# EAGLE board CT_schematic (EAGLE 7.6.0)

Size 100 x 80 mm. Coordinates in mm from the lower left corner, seen from the top.
Outline: 0,0 100,0 100,80 0,80 0,0
Copper layers (1*16): Top 0.035mm / dielectric 1.5mm / Bottom 0.035mm
Design rules "default": minimum track width 10mil, minimum drill 24mil, track to track 8mil, track to pad 8mil, pad to pad 8mil, via to via 8mil, smd to smd 8mil, copper to edge 40mil, drill to drill 8mil, minimum pad ring 10mil, minimum via ring 8mil, stop-mask expansion 4mil, vias tented up to drill 0mil, thermal gap 10mil

## Footprints (pad centres in the part's own frame; a part is rotated, then mirrored left to right if it is on the bottom)
C0603 = smd 0.8 x 0.8: 1 -0.762,0; 2 0.762,0
C0402 = smd 0.5 x 0.5: 1 -0.508,0; 2 0.508,0
C0805 = smd 1.2 x 1.3: 1 -1.016,0; 2 1.016,0
EXV-9H = smd 3.505 x 1.676: 1 -2.857,0; 2 2.857,0
L0603 = smd 0.8 x 0.8: 1 -0.762,0; 2 0.762,0
L0805 = smd 1.2 x 1.3: 1 -1.016,0; 2 1.016,0
PJ-037B_PACKAGE = drill 3.7 square: 1 12,0 | drill 3.2 square: 2 6,0
R0603 = smd 0.8 x 0.8: 1 -0.762,0; 2 0.762,0
LQFP100 = smd 0.3 x 1.2: 1 -6,-7.75; 2 -5.5,-7.75; 3 -5,-7.75; 4 -4.5,-7.75; 5 -4,-7.75; 6 -3.5,-7.75; 7 -3,-7.75; 8 -2.5,-7.75; 9 -2,-7.75; 10 -1.5,-7.75; 11 -1,-7.75; 12 -0.5,-7.75; 13 0,-7.75; 14 0.5,-7.75; 15 1,-7.75; 16 1.5,-7.75; 17 2,-7.75; 18 2.5,-7.75; 19 3,-7.75; 20 3.5,-7.75; 21 4,-7.75; 22 4.5,-7.75; 23 5,-7.75; 24 5.5,-7.75; 25 6,-7.75; 51 6,7.75; 52 5.5,7.75; 53 5,7.75; 54 4.5,7.75; 55 4,7.75; 56 3.5,7.75; 57 3,7.75; 58 2.5,7.75; 59 2,7.75; 60 1.5,7.75; 61 1,7.75; 62 0.5,7.75; 63 0,7.75; 64 -0.5,7.75; 65 -1,7.75; 66 -1.5,7.75; 67 -2,7.75; 68 -2.5,7.75; 69 -3,7.75; 70 -3.5,7.75; 71 -4,7.75; 72 -4.5,7.75; 73 -5,7.75; 74 -5.5,7.75; 75 -6,7.75 | smd 1.2 x 0.3: 26 7.75,-6; 27 7.75,-5.5; 28 7.75,-5; 29 7.75,-4.5; 30 7.75,-4; 31 7.75,-3.5; 32 7.75,-3; 33 7.75,-2.5; 34 7.75,-2; 35 7.75,-1.5; 36 7.75,-1; 37 7.75,-0.5; 38 7.75,0; 39 7.75,0.5; 40 7.75,1; 41 7.75,1.5; 42 7.75,2; 43 7.75,2.5; 44 7.75,3; 45 7.75,3.5; 46 7.75,4; 47 7.75,4.5; 48 7.75,5; 49 7.75,5.5; 50 7.75,6; 76 -7.75,6; 77 -7.75,5.5; 78 -7.75,5; 79 -7.75,4.5; 80 -7.75,4; 81 -7.75,3.5; 82 -7.75,3; 83 -7.75,2.5; 84 -7.75,2; 85 -7.75,1.5; 86 -7.75,1; 87 -7.75,0.5; 88 -7.75,0; 89 -7.75,-0.5; 90 -7.75,-1; 91 -7.75,-1.5; 92 -7.75,-2; 93 -7.75,-2.5; 94 -7.75,-3; 95 -7.75,-3.5; 96 -7.75,-4; 97 -7.75,-4.5; 98 -7.75,-5; 99 -7.75,-5.5; 100 -7.75,-6
SOIC-8 = smd 1.6 x 0.6: 1 -2.7,1.905 | smd 1.55 x 0.6: 2 -2.7,0.635; 3 -2.7,-0.635; 4 -2.7,-1.905; 5 2.7,-1.905; 6 2.7,-0.635; 7 2.7,0.635; 8 2.7,1.905
ETRX3587 = smd 1 x 1.4: 1 0,0; 2 1.27,0; 3 2.54,0; 4 3.81,0; 5 5.08,0; 6 6.35,0; 7 7.62,0; 8 8.89,0; 9 10.16,0; 10 11.43,0; 11 12.7,0; 12 13.97,0; 13 15.24,0; 14 16.51,0; 15 17.78,0; 16 19.05,0; 17 20.32,0; 18 21.59,0; 19 22.86,0; 20 22.86,18.8; 21 21.59,18.8; 22 20.32,18.8; 23 19.05,18.8; 24 17.78,18.8; 25 16.51,18.8; 26 15.24,18.8; 27 13.97,18.8; 28 12.7,18.8; 29 11.43,18.8; 30 10.16,18.8; 31 8.89,18.8; 32 7.62,18.8; 33 6.35,18.8
SAMTEC_FTSH-105-01-L-DV-K = smd 0.762 x 2.794: 1 -2.54,-2.032; 2 -2.54,2.032; 3 -1.27,-2.032; 4 -1.27,2.032; 5 0,-2.032; 6 0,2.032; 7 1.27,-2.032; 8 1.27,2.032; 9 2.54,-2.032; 10 2.54,2.032
SSOP-28 = smd 1.5 x 0.4: 1 -3.625,4.225; 2 -3.625,3.575; 3 -3.625,2.925; 4 -3.625,2.275; 5 -3.625,1.625; 6 -3.625,0.975; 7 -3.625,0.325; 8 -3.625,-0.325; 9 -3.625,-0.975; 10 -3.625,-1.625; 11 -3.625,-2.275; 12 -3.625,-2.925; 13 -3.625,-3.575; 14 -3.625,-4.225; 15 3.625,-4.225; 16 3.625,-3.575; 17 3.625,-2.925; 18 3.625,-2.275; 19 3.625,-1.625; 20 3.625,-0.975; 21 3.625,-0.325; 22 3.625,0.325; 23 3.625,0.975; 24 3.625,1.625; 25 3.625,2.275; 26 3.625,2.925; 27 3.625,3.575; 28 3.625,4.225
182-009-MALE = drill 1.194 pad 1.524 octagon: 1 -5.537,10.923; 2 -2.769,10.923; 3 0,10.923; 4 2.769,10.923; 5 5.537,10.923; 6 -4.153,8.08; 7 -1.384,8.08; 8 1.384,8.08; 9 4.153,8.08 | hole 3.048: -12.446,9.501; 12.446,9.501
ABS07-32.768KHZ-7-T = smd 1.1 x 2.4: 1 -2.5,0; 2 0,0
ABLS-25.000MHZ-B2F-T = smd 5.6 x 2.8: 1 -3.81,0; 2 5.69,0
TSOT-23-5 = smd 1.3 x 0.62: 1 -1.31,0.95; 2 -1.31,0; 3 -1.31,-0.95; 4 1.31,-0.95; 5 1.31,0.95
SON-6 = smd 0.55 x 0.3: 1 -0.355,0.5 | smd 0.52 x 0.3: 2 -0.37,0; 3 -0.37,-0.5; 4 0.37,-0.5; 5 0.37,0; 6 0.37,0.5
SW_4-1437565-2 = smd 1.4 x 2.1: 1 -2.23,4.55; 2 -2.23,-4.55; 3 2.23,4.55; 4 2.23,-4.55
LGM67K-G1J2-24-Z = smd 0.8 x 1.4: A -2,0; C 0,0
NC7SZ125M5X = smd 1.3 x 0.7: 1 -1.3,0.95; 2 -1.3,0; 3 -1.3,-0.95; 4 1.3,-0.95; 5 1.3,0.95
DUMMY_PACKAGE_146 = drill 0.3: 1 0,-1; 2 1.5,-1; 3 3,-1

## Placement (x,y rotation side)
C1  1e-07  [C0603]  -58.42,90.17 0 top  (outside the outline)
C2  1e-07  [C0603]  -62.23,90.17 0 top  (outside the outline)
C3  1e-07  [C0603]  -66.04,90.17 0 top  (outside the outline)
C4  1e-07  [C0603]  -69.85,90.17 0 top  (outside the outline)
C5  1e-07  [C0603]  -73.66,90.17 0 top  (outside the outline)
C6  4.7e-06  [C0603]  -54.61,90.17 0 top  (outside the outline)
C7  1e-07  [C0603]  -77.47,90.17 0 top  (outside the outline)
C8  1e-08  [C0603]  -81.28,90.17 0 top  (outside the outline)
C9  1e-06  [C0603]  -15.24,95.25 0 top  (outside the outline)
C10  1e-11  [C0402]  -41.91,95.25 0 top  (outside the outline)
C11  1e-11  [C0402]  -45.72,95.25 0 top  (outside the outline)
C12  1e-11  [C0402]  -49.53,95.25 0 top  (outside the outline)
C13  1e-11  [C0402]  -53.34,95.25 0 top  (outside the outline)
C14  1e-08  [C0402]  -57.15,95.25 0 top  (outside the outline)
C15  1e-07  [C0402]  -60.96,95.25 0 top  (outside the outline)
C16  1e-07  [C0402]  -64.77,95.25 0 top  (outside the outline)
C17  1e-07  [C0402]  -68.58,95.25 0 top  (outside the outline)
C18  1e-07  [C0402]  -72.39,95.25 0 top  (outside the outline)
C19  1e-07  [C0402]  -76.2,95.25 0 top  (outside the outline)
C20  1e-07  [C0402]  -80.01,95.25 0 top  (outside the outline)
C21  1e-07  [C0402]  -15.24,100.33 0 top  (outside the outline)
C22  1e-05  [C0805]  -21.59,83.82 0 top  (outside the outline)
C23  1e-05  [C0805]  -26.67,83.82 0 top  (outside the outline)
C24  1e-07  [C0402]  -19.05,100.33 0 top  (outside the outline)
C25  0.0001  [EXV-9H]  -52.07,64.77 0 top  (outside the outline)
C26  0.0001  [EXV-9H]  -63.5,64.77 0 top  (outside the outline)
C27  1e-08  [C0402]  -22.86,100.33 0 top  (outside the outline)
C28  1e-08  [C0402]  -26.67,100.33 0 top  (outside the outline)
C29  1e-08  [C0402]  -30.48,100.33 0 top  (outside the outline)
F1  240.0  [L0603]  -19.05,95.25 0 top  (outside the outline)
I1  1e-05  [L0805]  -31.75,83.82 0 top  (outside the outline)
J1  PJ-037B  [PJ-037B_PACKAGE]  -69.85,52.07 0 top  (outside the outline)
R2  1000.0  [R0603]  -22.86,95.25 0 top  (outside the outline)
R4  4700.0  [R0603]  -26.67,95.25 0 top  (outside the outline)
R5  4700.0  [R0603]  -30.48,95.25 0 top  (outside the outline)
R6  10000.0  [R0603]  -69.85,83.82 0 top  (outside the outline)
R7  10000.0  [R0603]  -74.93,83.82 0 top  (outside the outline)
R8  10000.0  [R0603]  -80.01,83.82 0 top  (outside the outline)
R9  10000.0  [R0603]  -15.24,90.17 0 top  (outside the outline)
R10  10000.0  [R0603]  -20.32,90.17 0 top  (outside the outline)
R11  10000.0  [R0603]  -25.4,90.17 0 top  (outside the outline)
R12  10000.0  [R0603]  -30.48,90.17 0 top  (outside the outline)
R13  10000.0  [R0603]  -35.56,90.17 0 top  (outside the outline)
R14  10000.0  [R0603]  -40.64,90.17 0 top  (outside the outline)
R15  5.0  [R0603]  -34.29,95.25 0 top  (outside the outline)
R16  100000.0  [R0603]  -49.53,83.82 0 top  (outside the outline)
R17  220000.0  [R0603]  -54.61,83.82 0 top  (outside the outline)
R18  1000000.0  [R0603]  -44.45,83.82 0 top  (outside the outline)
R19  10000.0  [R0603]  -45.72,90.17 0 top  (outside the outline)
R20  10000.0  [R0603]  -50.8,90.17 0 top  (outside the outline)
R21  9100.0  [R0603]  -38.1,95.25 0 top  (outside the outline)
R22  680000.0  [R0603]  -59.69,83.82 0 top  (outside the outline)
R23  120000.0  [R0603]  -64.77,83.82 0 top  (outside the outline)
U1  STM32L152VET6  [LQFP100]  -63.5,31.75 0 top  (outside the outline)
U2  AT25512N-SH-T  [SOIC-8]  -41.91,66.04 0 top  (outside the outline)
U3  ETRX3587  [ETRX3587]  -48.26,1.27 0 top  (outside the outline)
U4  FTSH-105-01-L-DV-K  [SAMTEC_FTSH-105-01-L-DV-K]  -48.26,53.34 0 top  (outside the outline)
U5  ST3241EBPR  [SSOP-28]  -19.05,53.34 0 top  (outside the outline)
U6  182-009-113R531  [182-009-MALE]  -36.83,29.21 0 top  (outside the outline)
U7  ABS07-32.768KHZ-7-T  [ABS07-32.768KHZ-7-T]  -49.53,77.47 0 top  (outside the outline)
U8  ABLS-25.000MHZ-B2F-T  [ABLS-25.000MHZ-B2F-T]  -26.67,77.47 0 top  (outside the outline)
U9  ltc3406es5  [TSOT-23-5]  -36.83,83.82 0 top  (outside the outline)
U10  TPS3895ADRYR  [SON-6]  -39.37,99.06 0 top  (outside the outline)
U11  4-1437565-2  [SW_4-1437565-2]  -27.94,67.31 0 top  (outside the outline)
U12  Q65110A2395  [LGM67K-G1J2-24-Z]  -58.42,76.2 0 top  (outside the outline)
U13  nc7sz125m5x  [NC7SZ125M5X]  -69.85,74.93 0 top  (outside the outline)
U14  nc7sz125m5x  [NC7SZ125M5X]  -76.2,74.93 0 top  (outside the outline)
U15  nc7sz125m5x  [NC7SZ125M5X]  -15.24,83.82 0 top  (outside the outline)
U16  Dummy  [DUMMY_PACKAGE_146]  -36.83,100.33 0 top  (outside the outline)

## Library data of the parts
C1-C29 F1 I1 J1 R2 R4-R23 U1-U16 = circuit_tree

## Nets
CLK_CRYSTAL_U1_8: C10.1 U1.8 U7.1
CLK_CRYSTAL_U1_9: C11.1 U1.9 U7.2
CLK_CRYSTAL_U1_12: C12.1 U1.12 U8.1
CLK_CRYSTAL_U1_13: C13.1 U1.13 U8.2
GND: C1.2 C2.2 C3.2 C4.2 C5.2 C6.2 C7.2 C8.2 C9.2 C10.2 C11.2 C12.2 C13.2 C14.2 C15.2 C16.2 C17.2 C20.2 C21.2 C22.2 C23.1 C23.2 C24.2 C25.2 C26.2 C27.2 C28.2 C29.2 J1.2 R2.2 R6.2 R10.2 R14.2 R15.2 R17.2 R21.2 R23.2 U1.10 U1.19 U1.20 U1.27 U1.49 U1.74 U1.99 U2.4 U3.1 U3.13 U3.19 U3.20 U3.31 U3.33 U4.3 U4.5 U5.23 U5.25 U6.5 U9.2 U10.2 U12.C U13.2 U13.3 U14.1 U14.3 U15.1 U15.3 U16.1
NET_U1_6: C7.1 U1.6
NET_U1_14: R5.1 U1.14 U15.4
NET_U1_22: C8.1 C9.1 F1.1 U1.21 U1.22
NET_U1_94: R6.1 U1.94
NET_U1_97: U12.A
NET_U1_98: U11.3 U11.4
NET_U2_3: R7.1 U2.3
NET_U2_7: R9.1 U2.7
NET_U3_7: R4.1 U3.7 U14.4
NET_U3_21: R10.1 U3.21
NET_U4_9: R15.1 U4.9
NET_U5_1: C19.1 U5.1
NET_U5_2: C19.2 U5.2
NET_U5_3: C21.1 U5.3
NET_U5_22: R16.1 U5.22
NET_U5_24: C18.2 U5.24
NET_U5_27: C20.1 U5.27
NET_U5_28: C18.1 U5.28
NET_U6_2: U5.4 U6.2
NET_U6_3: U5.9 U6.3
NET_U6_7: U5.5 U6.7
NET_U6_8: U5.10 U6.8
NET_U9_1: U9.1
NET_U9_3: I1.1 U9.3
NET_U9_5: R17.1 R18.1 U9.5
NET_U9_ATNET_3: I1.2 R18.2
NET_U10_1: R20.1 R21.1 U10.1
NET_U10_3: R22.2 R23.1 U10.3
NET_U10_4: R19.1 U10.4 U13.4 U14.2 U15.2
NET_U11_1: R2.1 U11.1 U11.2
PROC_SPI1_MISO: U1.31 U2.2
PROC_SPI1_MOSI: U1.32 U2.5
PROC_SPI1_NSS: R8.1 U1.29 U2.1
PROC_SPI1_SCK: U1.30 U2.6
PROC_SYS_JTCK_SWCLK: R14.1 U1.76 U4.4
PROC_SYS_JTDI: R12.1 U1.77 U4.8
PROC_SYS_JTDO_TRACESWO: U1.89 U4.6
PROC_SYS_JTMS_SWDIO: R13.1 U1.72 U4.2
PROC_TIM2_CH1: U1.23 U16.3
PROC_TIM2_CH3: U1.25 U16.2
PROC_UART4_RX: U1.79 U3.17
PROC_UART4_TX: U1.78 U3.18
PROC_UART5_RX: U1.83 U5.19
PROC_UART5_TX: U1.80 U5.14
RST_OUT_U4_JTAG_RST_B: R11.1 U4.10 U13.1
VCC_S1_5V4: C22.1 C25.1 C26.1 J1.1 U9.4
VCC_TIER1_3V3: C1.1 C2.1 C3.1 C4.1 C5.1 C6.1 C14.1 C15.1 C16.1 C17.1 C23.2 C24.1 C27.1 C28.1 C29.1 F1.2 I1.2 R4.2 R5.2 R7.2 R8.2 R9.2 R11.2 R12.2 R13.2 R16.2 R18.2 R19.2 R20.2 R22.1 U1.11 U1.28 U1.50 U1.75 U1.100 U2.8 U3.32 U4.1 U5.26 U10.6 U13.5 U14.5 U15.5

## Tracks (layer width: path | path; a pad name or v marks a point on that pad's centre or on a via)
CLK_CRYSTAL_U1_8  (2 unrouted)
CLK_CRYSTAL_U1_9  (2 unrouted)
CLK_CRYSTAL_U1_12  (2 unrouted)
CLK_CRYSTAL_U1_13  (2 unrouted)
GND  (65 unrouted)
NET_U1_6  (1 unrouted)
NET_U1_14  (2 unrouted)
NET_U1_22  (4 unrouted)
NET_U1_94  (1 unrouted)
NET_U1_98  (1 unrouted)
NET_U2_3  (1 unrouted)
NET_U2_7  (1 unrouted)
NET_U3_7  (2 unrouted)
NET_U3_21  (1 unrouted)
NET_U4_9  (1 unrouted)
NET_U5_1  (1 unrouted)
NET_U5_2  (1 unrouted)
NET_U5_3  (1 unrouted)
NET_U5_22  (1 unrouted)
NET_U5_24  (1 unrouted)
NET_U5_27  (1 unrouted)
NET_U5_28  (1 unrouted)
NET_U6_2  (1 unrouted)
NET_U6_3  (1 unrouted)
NET_U6_7  (1 unrouted)
NET_U6_8  (1 unrouted)
NET_U9_3  (1 unrouted)
NET_U9_5  (2 unrouted)
NET_U9_ATNET_3  (1 unrouted)
NET_U10_1  (2 unrouted)
NET_U10_3  (2 unrouted)
NET_U10_4  (4 unrouted)
NET_U11_1  (2 unrouted)
PROC_SPI1_MISO  (1 unrouted)
PROC_SPI1_MOSI  (1 unrouted)
PROC_SPI1_NSS  (2 unrouted)
PROC_SPI1_SCK  (1 unrouted)
PROC_SYS_JTCK_SWCLK  (2 unrouted)
PROC_SYS_JTDI  (2 unrouted)
PROC_SYS_JTDO_TRACESWO  (1 unrouted)
PROC_SYS_JTMS_SWDIO  (2 unrouted)
PROC_TIM2_CH1  (1 unrouted)
PROC_TIM2_CH3  (1 unrouted)
PROC_UART4_RX  (1 unrouted)
PROC_UART4_TX  (1 unrouted)
PROC_UART5_RX  (1 unrouted)
PROC_UART5_TX  (1 unrouted)
RST_OUT_U4_JTAG_RST_B  (2 unrouted)
VCC_S1_5V4  (4 unrouted)
VCC_TIER1_3V3  (42 unrouted)